# EAGLE board ws2812_Sqaure (EAGLE 8.7.1)
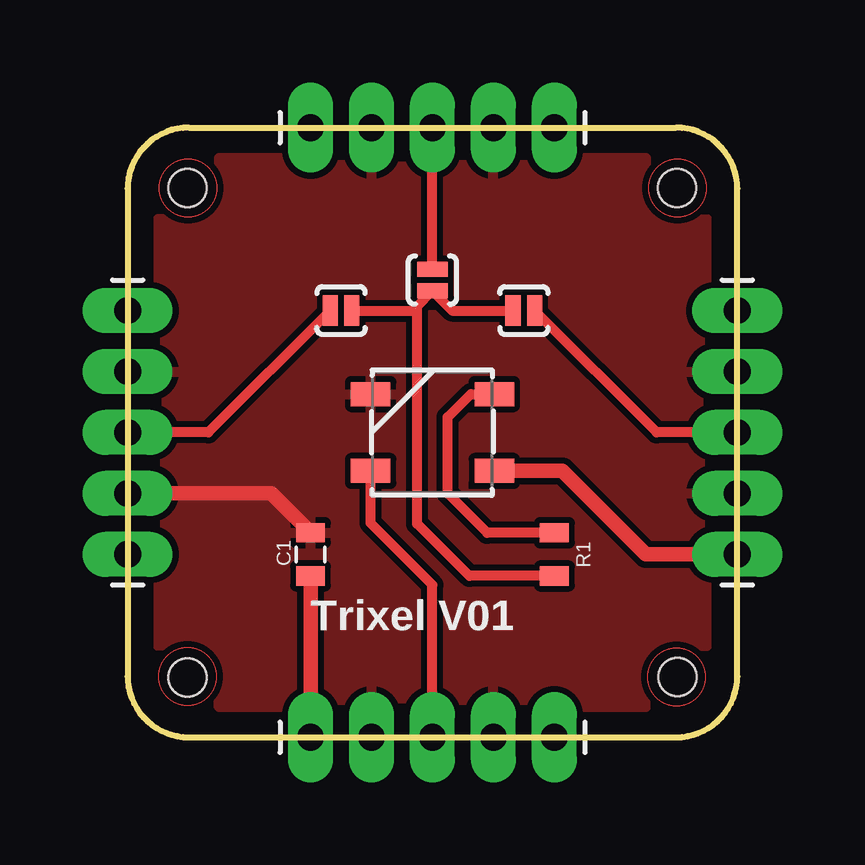
[diagram p0: board, top side]
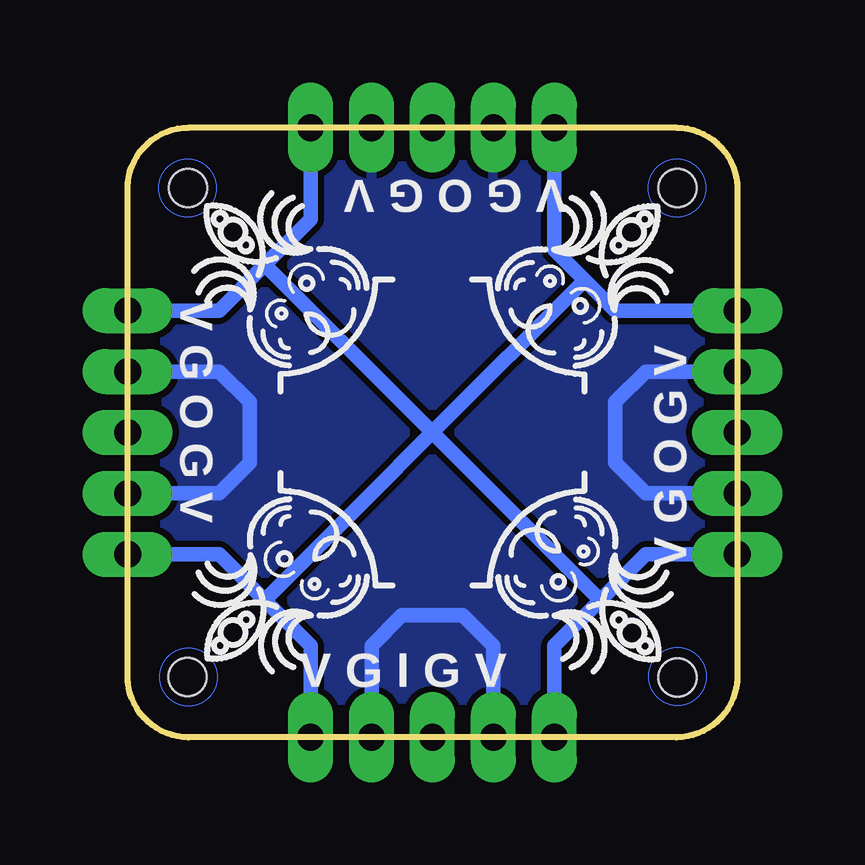
[diagram p1: board, bottom side, seen from below]

Size 25.4 x 25.4 mm. Coordinates in mm from the lower left corner, seen from the top.
Outline: 2.54,0 22.86,0 arc90 25.4,2.54 25.4,22.86 arc90 22.86,25.4 2.54,25.4 arc90 0,22.86 0,2.54 arc90 2.54,0
Copper layers (1*16): Top 0.035mm / dielectric 1.5mm / Bottom 0.035mm
Design rules "SeeedStudio_2layer_DRU_no_angle_20140221 *": minimum track width 6mil, minimum drill 12mil, track to track 6mil, track to pad 6mil, pad to pad 6mil, via to via 6mil, smd to smd 0mil, copper to edge 10mil, drill to drill 10mil, minimum pad ring 10mil, minimum via ring 6mil, stop-mask expansion 2mil, vias tented up to drill 20mil, thermal gap 10mil
Holes 1.6 mm at 2.49,2.49 2.49,22.89 22.91,2.51 22.89,22.89

## Footprints (pad centres in the part's own frame; a part is rotated, then mirrored left to right if it is on the bottom)
0805 = smd 0.8 x 1.2: 1 -0.9,0; 2 0.9,0
WS2812B = smd 1.651 x 1: 1 -2.577,1.6; 2 -2.577,-1.6; 3 2.577,-1.6; 4 2.577,1.6
1X05_LONGPADS = drill 1.118 pad 1.88 long: 1 0,0; 2 2.54,0; 3 5.08,0; 4 7.62,0; 5 10.16,0
PAD-JUMPER-2-NO_YES_SILK = smd 0.635 x 1.27: 1 -0.45,0; 2 0.45,0

## Placement (x,y rotation side)
C1  0.1uF  [0805]  7.62,7.62 270 top
D1  [WS2812B]  12.7,12.7 180 top
J5  [1X05_LONGPADS]  0,7.62 90 top
J6  [1X05_LONGPADS]  25.4,7.62 90 top
J7  [1X05_LONGPADS]  7.62,25.4 0 top
J8  [1X05_LONGPADS]  7.62,0 0 top
JP1  JUMPER-PAD-2-NOYES_SILK  [PAD-JUMPER-2-NO_YES_SILK]  16.51,17.78 0 top
JP2  JUMPER-PAD-2-NOYES_SILK  [PAD-JUMPER-2-NO_YES_SILK]  12.7,19.05 90 top
JP3  JUMPER-PAD-2-NOYES_SILK  [PAD-JUMPER-2-NO_YES_SILK]  8.89,17.78 180 top
R1  [0805]  17.78,7.62 270 top

## Library data of the parts
C1 = SparkFun-Capacitors
D1 = SparkFun-LED; PROD_ID: DIO-12503
J5-J8 = SparkFun-Connectors
JP1-JP3 = SparkFun-Passives
R1 = SparkFun-Resistors

## Nets
DIN: D1.4 J8.3
DOUT: JP1.1 JP2.1 JP3.1 R1.2
GND: C1.1 D1.3 J5.2 J5.4 J6.2 J6.4 J7.2 J7.4 J8.2 J8.4
N$1: J7.3 JP2.2
N$2: J6.3 JP1.2
N$3: J5.3 JP3.2
N$4: D1.2 R1.1
VIN: C1.2 D1.1 J5.1 J5.5 J6.1 J6.5 J7.1 J7.5 J8.1 J8.5

## Tracks (layer width: path | path; a pad name or v marks a point on that pad's centre or on a via)
DIN
  Top 0.406: J8.3 12.7,6.35 10.12,8.93 D1.4
DOUT
  Top 0.406: JP2.1 11.88,17.78 JP3.1 | JP2.1 13.52,17.78 JP1.1 | R1.2 14.23,6.72 12.06,8.89 12.06,17.96 JP2.1
GND
  Top 0.61: C1.1 5.98,10.16 J5.2
  Bottom 0.61: J5.2 3.81,10.16 5.08,11.43 5.08,13.97 3.81,15.24 J5.4 | J6.2 21.59,10.16 20.32,11.43 20.32,13.97 21.59,15.24 J6.4 | J8.4 15.24,3.81 13.97,5.08 11.43,5.08 10.16,3.81 J8.2
  pour Top (isolate 0.254): 3.81,1.27 21.59,1.27 24.13,3.81 24.13,21.59 21.59,24.13 3.81,24.13 1.27,21.59 1.27,3.81
  pour Bottom (isolate 0.254): 1.27,5.08 1.27,3.81 3.81,1.27 21.59,1.27 24.13,3.81 24.13,21.59 21.59,24.13 3.81,24.13 1.27,21.59
N$1
  Top 0.406: JP2.2 J7.3
N$2
  Top 0.406: J6.3 22.04,12.7 JP1.2
N$3
  Top 0.406: JP3.2 3.36,12.7 J5.3
N$4
  Top 0.406: R1.1 14.97,8.52 13.34,10.16 13.34,13.34 14.3,14.3 D1.2
VIN
  Top 0.61: J8.1 C1.2 | D1.1 18.11,11.1 21.59,7.62 J6.1
  Bottom 0.61: J8.1 7.62,3.81 5.71,5.71 | 5.71,5.71 3.81,7.62 J5.1 | J8.5 17.78,3.81 19.68,5.71 | 19.68,5.71 21.59,7.62 J6.1 | J6.5 21.59,17.78 19.68,19.68 | 19.68,19.68 17.78,21.59 J7.5 | J7.1 7.62,20.32 6.35,19.05 | 6.35,19.05 5.08,17.78 J5.5 | 19.68,5.71 15.56,9.84 12.7,12.7 | 12.7,12.7 6.35,19.05 | 19.68,19.68 12.7,12.7 | 12.7,12.7 5.71,5.71
(copper drawn outside any net)
  shapes: Bottom circle x4, Top circle x4

## Text on the board
tPlace: Trixel V01
bPlace: V G O G V | V G O G V | V G O G V | V G I G V